# EAGLE board TEXAS INSTRUMENTS DRV8833 (EAGLE 9.6.2)
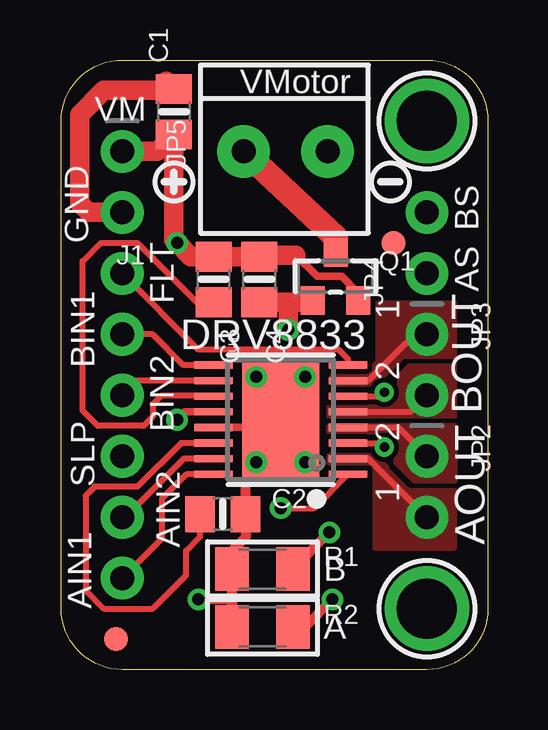
[diagram p0: board, top side]
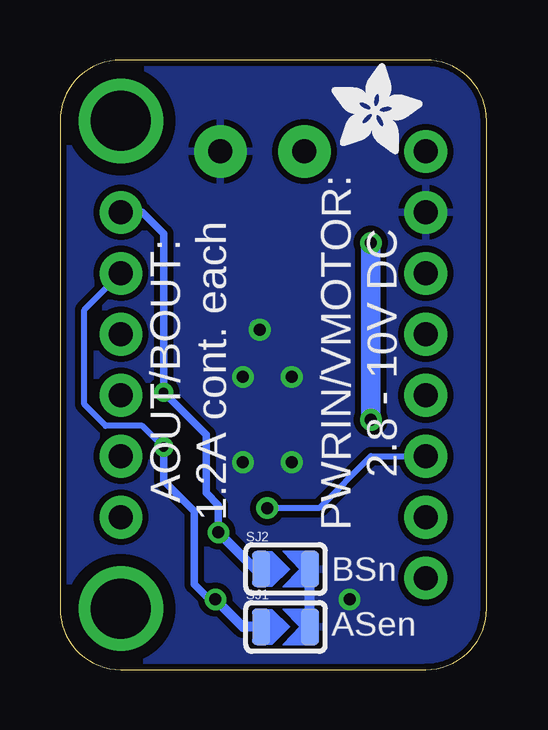
[diagram p1: board, bottom side, seen from below]

Size 17.78 x 25.4 mm. Coordinates in mm from the lower left corner, seen from the top.
Outline: 2.54,25.4 15.24,25.4 arc-90 17.78,22.86 17.78,2.54 arc-90 15.24,0 2.54,0 arc-90 0,2.54 0,22.86 arc-90 2.54,25.4
Copper layers (1*16): Top 0.035mm / dielectric 1.5mm / Bottom 0.035mm
Design rules "adafruit *": minimum track width 8mil, minimum drill 15.5mil, track to track 8mil, track to pad 8mil, pad to pad 8mil, via to via 8mil, smd to smd 8mil, copper to edge 10mil, drill to drill 8mil, minimum pad ring 10mil, minimum via ring 8mil, stop-mask expansion 2mil, vias tented up to drill 20mil, thermal gap 10mil

## Footprints (pad centres in the part's own frame; a part is rotated, then mirrored left to right if it is on the bottom)
0805-NO = smd 1.24 x 1.5: 1 -0.95,0; 2 0.95,0
FIDUCIAL_1MM = smd 1 x 1: 1 0,0
TERMBLOCK_1X2-3.5MM = drill 1 pad 2.184: 1 1.8,0; 2 -1.7,0
1X02_ROUND = drill 1 pad 1.778: 1 -1.27,0; 2 1.27,0
1X08_ROUND_70 = drill 1 pad 1.778: 1 -8.89,0; 2 -6.35,0; 3 -3.81,0; 4 -1.27,0; 5 1.27,0; 6 3.81,0; 7 6.35,0; 8 8.89,0
SOT23-WIDE = smd 1 x 1.2: 1 -0.95,-1; 2 0.95,-1; 3 0,1
_1206 = smd 1.4 x 1.8: 1 -1.27,0; 2 1.27,0
SOLDERJUMPER_ARROW_NOPASTE = smd 0.762 x 1.524: 1 -1.016,0; 2 1.016,0
HTSSOP16 = smd 0.3 x 1.6: 1 -2.275,-2.8; 2 -1.625,-2.8; 3 -0.975,-2.8; 4 -0.325,-2.8; 5 0.325,-2.8; 6 0.975,-2.8; 7 1.625,-2.8; 8 2.275,-2.8; 9 2.275,2.8; 10 1.625,2.8; 11 0.975,2.8; 12 0.325,2.8; 13 -0.325,2.8; 14 -0.975,2.8; 15 -1.625,2.8; 16 -2.275,2.8 | smd 4.8 x 3.2: PPAD 0,0
MOUNTINGHOLE_2.5_PLATED = drill 2.5 pad 3.2: P$1 0,0

## Placement (x,y rotation side)
C1  10µF/16V  [0805-NO]  4.7,23.24 90 top
C2  10µF  [0805-NO]  6.73,6.48 0 top
C3  0.1uF  [0805-NO]  6.35,16.26 270 top
C4  10µF/16V  [0805-NO]  8.26,16.26 270 top
FID1  FIDUCIAL""  [FIDUCIAL_1MM]  13.84,17.78 0 top
FID2  FIDUCIAL""  [FIDUCIAL_1MM]  2.29,1.27 0 top
J1  VMOTORIN  [TERMBLOCK_1X2-3.5MM]  9.4,21.59 180 top
JP2  [1X02_ROUND]  15.24,7.62 270 top
JP3  [1X02_ROUND]  15.24,12.7 270 top
JP4  [1X02_ROUND]  15.24,17.78 90 top
JP5  [1X08_ROUND_70]  2.54,12.7 270 top
Q1  DMG3415U  [SOT23-WIDE]  11.43,16.38 0 top
R1  0.2Ω  [_1206]  8.38,4.19 0 top
R2  0.2Ω  [_1206]  8.38,1.78 0 top
SJ1  ISENSEA  [SOLDERJUMPER_ARROW_NOPASTE]  8.38,1.78 0 bottom
SJ2  ISENSEB  [SOLDERJUMPER_ARROW_NOPASTE]  8.38,4.19 0 bottom
U1  DRV8833PWPR  [HTSSOP16]  9.14,10.41 90 top
U$13  MOUNTINGHOLE2.5  [MOUNTINGHOLE_2.5_PLATED]  15.24,22.86 0 top
U$14  MOUNTINGHOLE2.5  [MOUNTINGHOLE_2.5_PLATED]  15.24,2.54 0 top
U$15  [SYMBOL_PLUS]  4.7,20.32 0 top
U$16  [SYMBOL_MINUS]  13.72,20.32 0 top
U$17  [ADAFRUIT_3.5MM]  6.48,21.46 0 bottom

## Library data of the parts
C1-C4 J1 JP2-JP5 Q1 R1 R2 U1 U$15-U$17 = microbuilder
FID1 FID2 SJ1 SJ2 U$13 U$14 = microbuilder; BOM: EXCLUDE

## Nets
!SLEEP: JP5.6 U1.1
AIN1: JP5.8 U1.16
AIN2: JP5.7 U1.15
AOUT1: JP2.2 U1.2
AOUT2: JP2.1 U1.4
ASEN: JP4.1 R2.2 SJ1.1 U1.3
BIN1: JP5.4 U1.9
BIN2: JP5.5 U1.10
BOUT1: JP3.1 U1.7
BOUT2: JP3.2 U1.5
BSEN: JP4.2 R1.2 SJ2.1 U1.6
GND: C1.2 C2.2 C4.2 J1.2 JP5.2 Q1.1 R1.1 R2.1 SJ1.2 SJ2.2 U1.13 U1.PPAD
N$8: C3.2 U1.11
NFAULT: JP5.3 U1.8
PWRIN: J1.1 Q1.3
VINT: C2.1 U1.14
VMOTOR: C1.1 C3.1 C4.1 JP5.1 Q1.2 U1.12

## Tracks (layer width: path | path; a pad name or v marks a point on that pad's centre or on a via)
!SLEEP  (via drill 0.5)
  Top 0.254: v9.14,6.73 10.54,6.73 U1.1
  Bottom 0.254: v9.14,6.73 6.98,6.73 4.83,8.89 JP5.6
AIN1
  Top 0.254: U1.16 5.22,8.14 4.19,7.11 4.19,5.46 JP5.8
AIN2
  Top 0.254: U1.15 5.11,8.79 2.67,6.35 JP5.7
AOUT1
  Top 0.254: U1.2 12.8,8.79 JP2.2
  pour Top (rank 2, no thermals): 11.18,8.89 11.18,8.64 13.08,8.64 13.08,5.08 16.38,5.08 16.38,7.62 14.61,7.62 12.95,8.89
AOUT2
  Top 0.254: U1.4 14.04,10.09 JP2.1
  pour Top (no thermals): 11.18,10.16 16.38,10.16 16.38,7.87 14.73,7.87 13.97,8.64 13.97,9.78 13.84,9.91 11.18,9.91
ASEN  (via drill 0.39, 0.5)
  Top 0.254: U1.3 13.29,9.44 v13.46,9.27
  Top 0.406: R2.2 10.16,1.78 v11.3,2.92
  Bottom 0.254: JP4.1 16.76,14.99 16.76,11.05 15.88,10.16 14.35,10.16 v13.46,9.27 | 11.56,2.92 v11.3,2.92
  Bottom 0.305: v13.46,9.27 13.46,7.87 12.19,6.6 12.19,3.56 11.56,2.92
  Bottom 0.406: SJ1.1 10.16,1.78 v11.3,2.92
BIN1
  Top 0.254: U1.9 5.09,12.69 3.81,13.97 JP5.4
BIN2
  Top 0.254: U1.10 3.15,12.04 JP5.5
BOUT1
  Top 0.254: U1.7 12.8,12.04 14.73,13.97 JP3.1
  pour Top (no thermals): 11.3,11.94 13.08,11.94 14.22,13.08 16.38,13.08 16.38,15.24 13.21,15.24 13.21,12.83 12.57,12.19 11.3,12.19
BOUT2
  Top 0.254: U1.5 14.55,10.74 JP3.2
  pour Top (rank 2, no thermals): 11.18,10.54 16.38,10.54 16.38,12.7 14.48,12.7 14.1,12.32 14.1,11.3 13.84,11.05 11.18,11.05
BSEN  (via drill 0.39, 0.5)
  Top 0.254: U1.6 13.29,11.39 v13.46,11.56
  Top 0.406: R1.2 v11.18,5.71
  Bottom 0.305: JP4.2 14.35,19.05 13.46,18.16 v13.46,11.56 11.68,9.78 11.68,7.37 11.18,6.86 v11.18,5.71
  Bottom 0.406: SJ2.1 R1.2 v11.18,5.71
GND  (via drill 0.5)
  Top 0.305: U1.13 8.51,10.09 8.82,10.09 arc90 U1.PPAD
  Top 0.406: 8.38,8.51 7.68,7.81 C2.2 7.68,5.52 7.11,4.95 R1.1 R2.1 7.11,2.92 v5.71,2.92 | 8.38,8.51 8.38,9.96 8.51,10.09 | 8.38,8.51 8.89,9.02
  Top 0.813: 4.38,24.51 C1.2 4.64,24.13 1.78,24.13 0.76,23.11 0.76,19.43 1.14,19.05 JP5.2 | C4.2 9.46,15.31 | Q1.1 arc-45 10.29,15.31 9.46,15.31 | 9.46,15.31 v9.46,14.16
  Bottom 0.406: v9.46,14.16 9.65,14.35 | SJ1.2 SJ2.2
  other vias: 8.13,12.19 10.16,8.64 8.13,8.64 10.16,12.19
  pour Bottom (isolate 0.254): 0,0 0,25.4 17.78,25.4 17.78,0
N$8
  Top 0.254: C3.2 5.65,15.31 3.17,17.78 1.65,17.78 0.89,17.02 0.89,10.79 1.52,10.16 3.43,10.16 3.81,10.54 3.81,11.05 4.19,11.43 6.3,11.43 U1.11
NFAULT
  Top 0.254: U1.8 11.94,12.95 11.56,13.33 5.71,13.33 JP5.3
PWRIN
  Top 1.016: J1.1 11.43,18.01 Q1.3
VINT
  Top 0.254: C2.1 5.78,5.53 5.21,4.95 5.21,3.94 3.81,2.54 1.78,2.54 1.02,3.3 1.02,7.24 1.4,7.62 3.17,7.62 4.99,9.44 U1.14
VMOTOR  (via drill 0.5)
  Top 0.305: U1.12 5.15,10.74 v4.83,10.41 | 9.78,17.27 10.67,16.38 11.68,16.38 12.38,15.69
  Top 0.406: 12.38,15.69 Q1.2
  Top 0.813: 9.78,17.27 8.32,17.27 C4.1 C3.1 5.4,17.21 v4.83,17.78 4.7,17.91 C1.1 4,21.59 JP5.1
  Bottom 0.813: v4.83,10.41 v4.83,17.78

## Text on the board
Unrouted: DRV8833 MOTOR SÜRÜCÜ KARTI | MAX 2 AMPER
tPlace: VMotor | VM | GND | BS | FLT | AS | 1 | DRV8833 | BIN1 | 2 | BIN2 | BOUT | 2 | SLP | 1 | AIN2 | AOUT | B | AIN1 | A
bPlace: PWRIN/VMOTOR: / 2.8 - 10V DC | AOUT/BOUT: / 1.2A cont. each | BSn | ASen